# Altium PCB TIDA01398_TID.PcbDoc (part 1 of 2)
Units mil, origin at the board's own origin, x right, y up, seen from the top; angles counter-clockwise.
Board outline 2952.76 x 1377.95 mil, 4 copper layers (Layer 1 - Top Layer, Layer 2 - GND, Layer 3 - PWR, Layer 4 - Bottom Layer), stack 43.668 mil thick; 120 components, 47 nets, 270 pads, 188 vias.
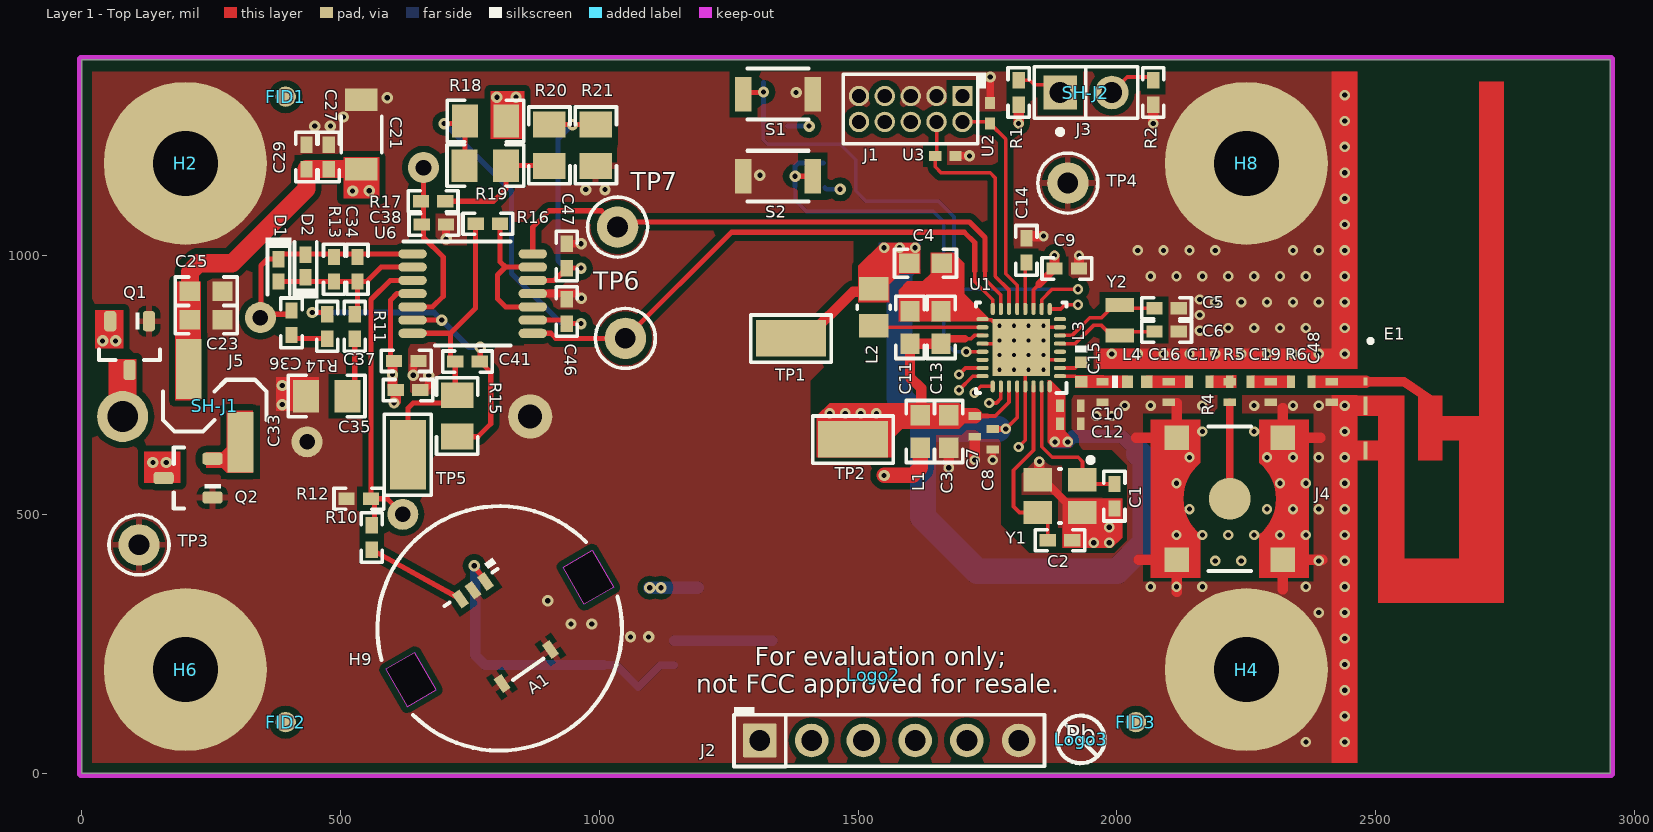
[diagram p0: Layer 1 - Top Layer view]
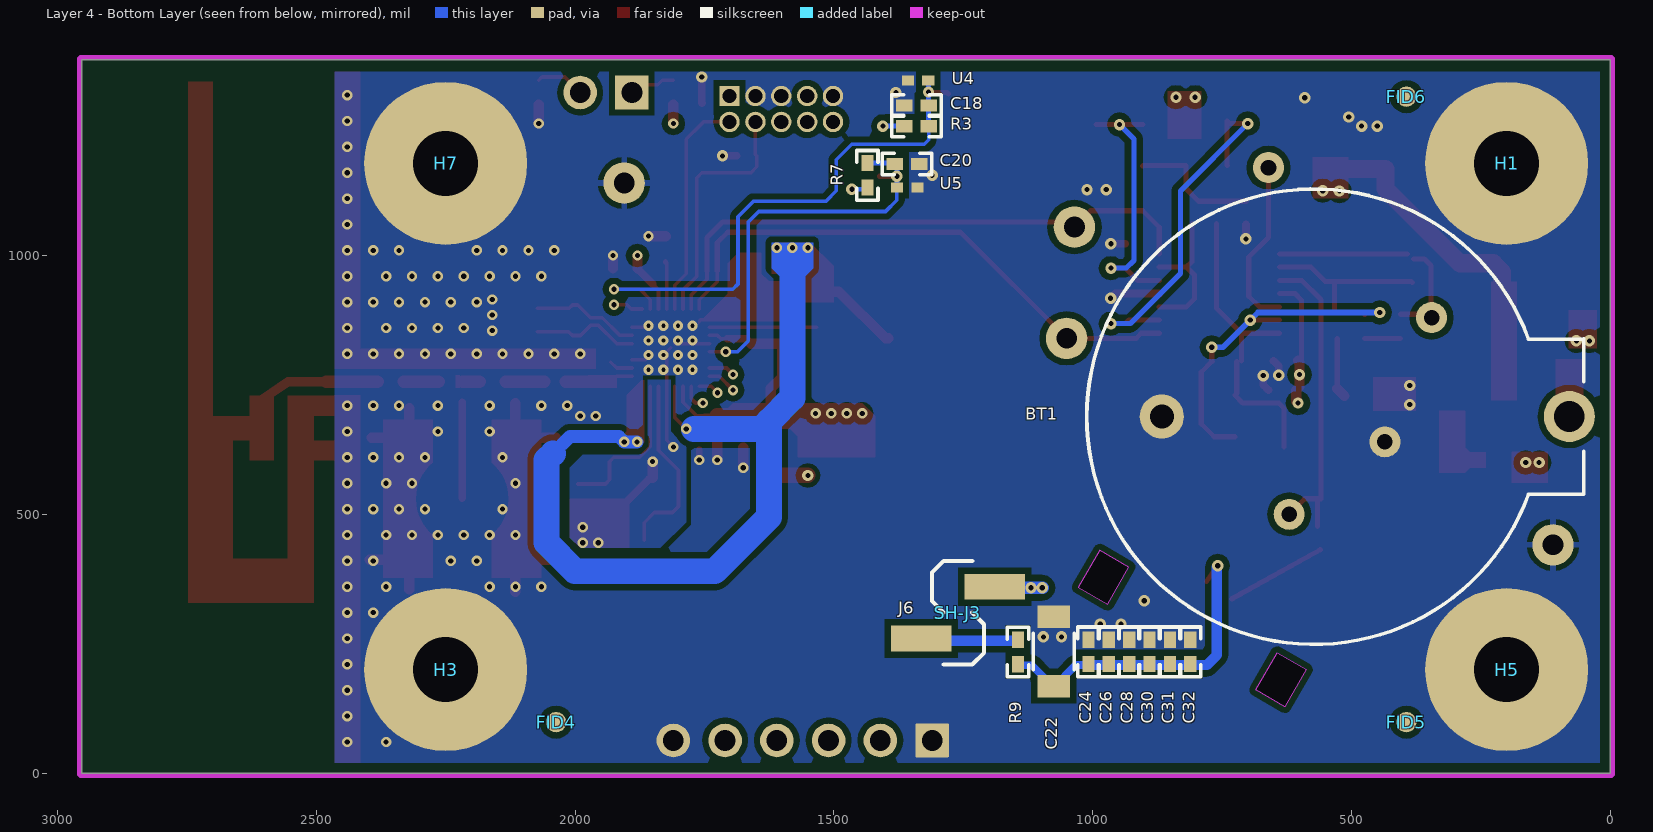
[diagram p1: Layer 4 - Bottom Layer view, seen from below]
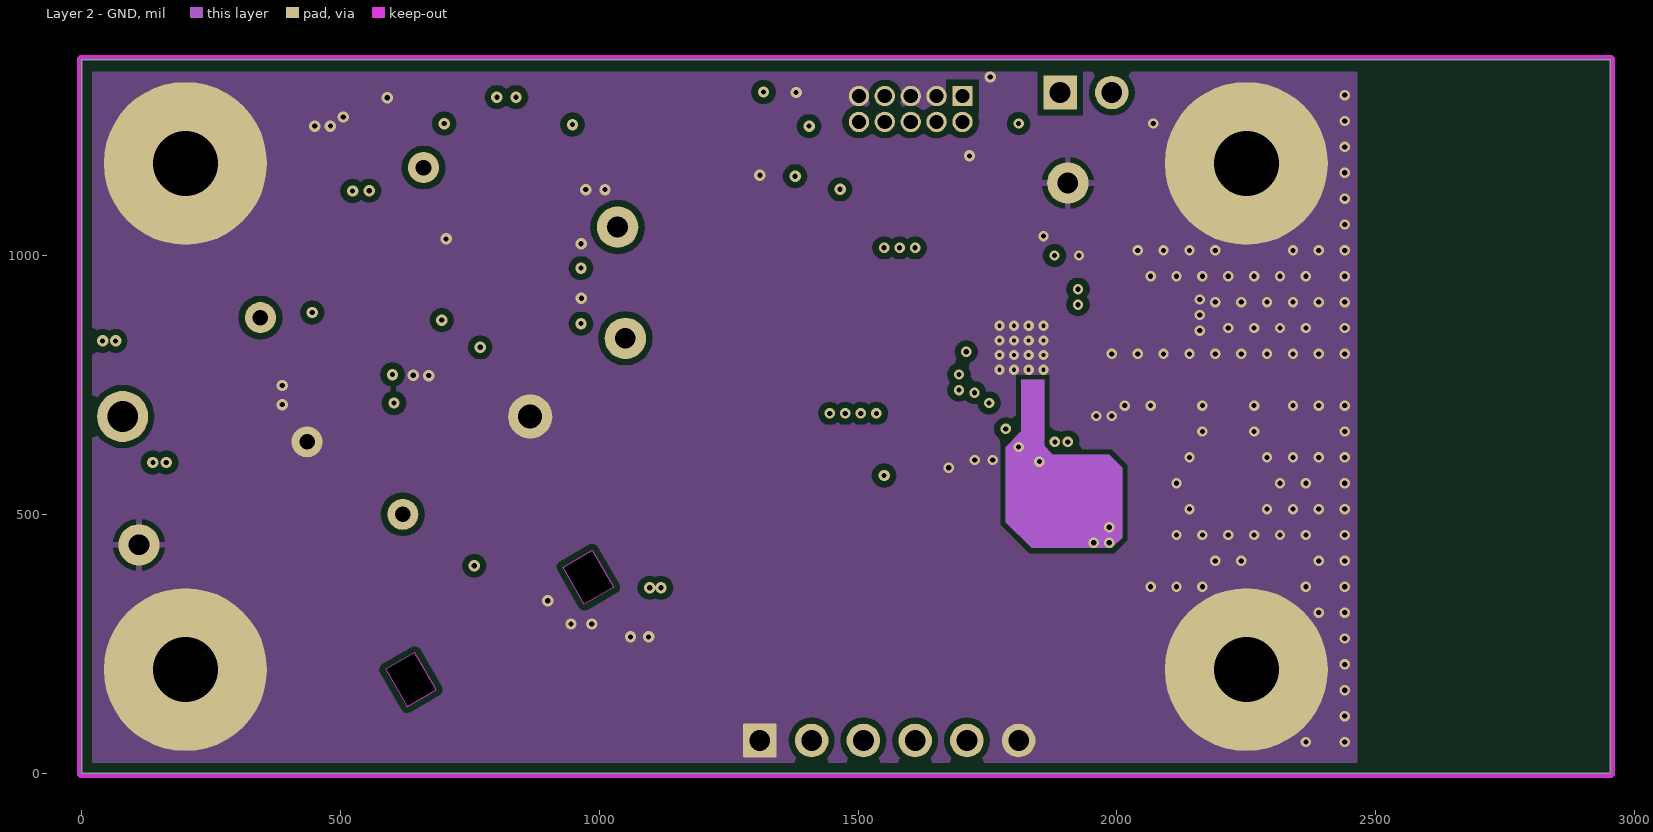
[diagram p2: Layer 2 - GND]
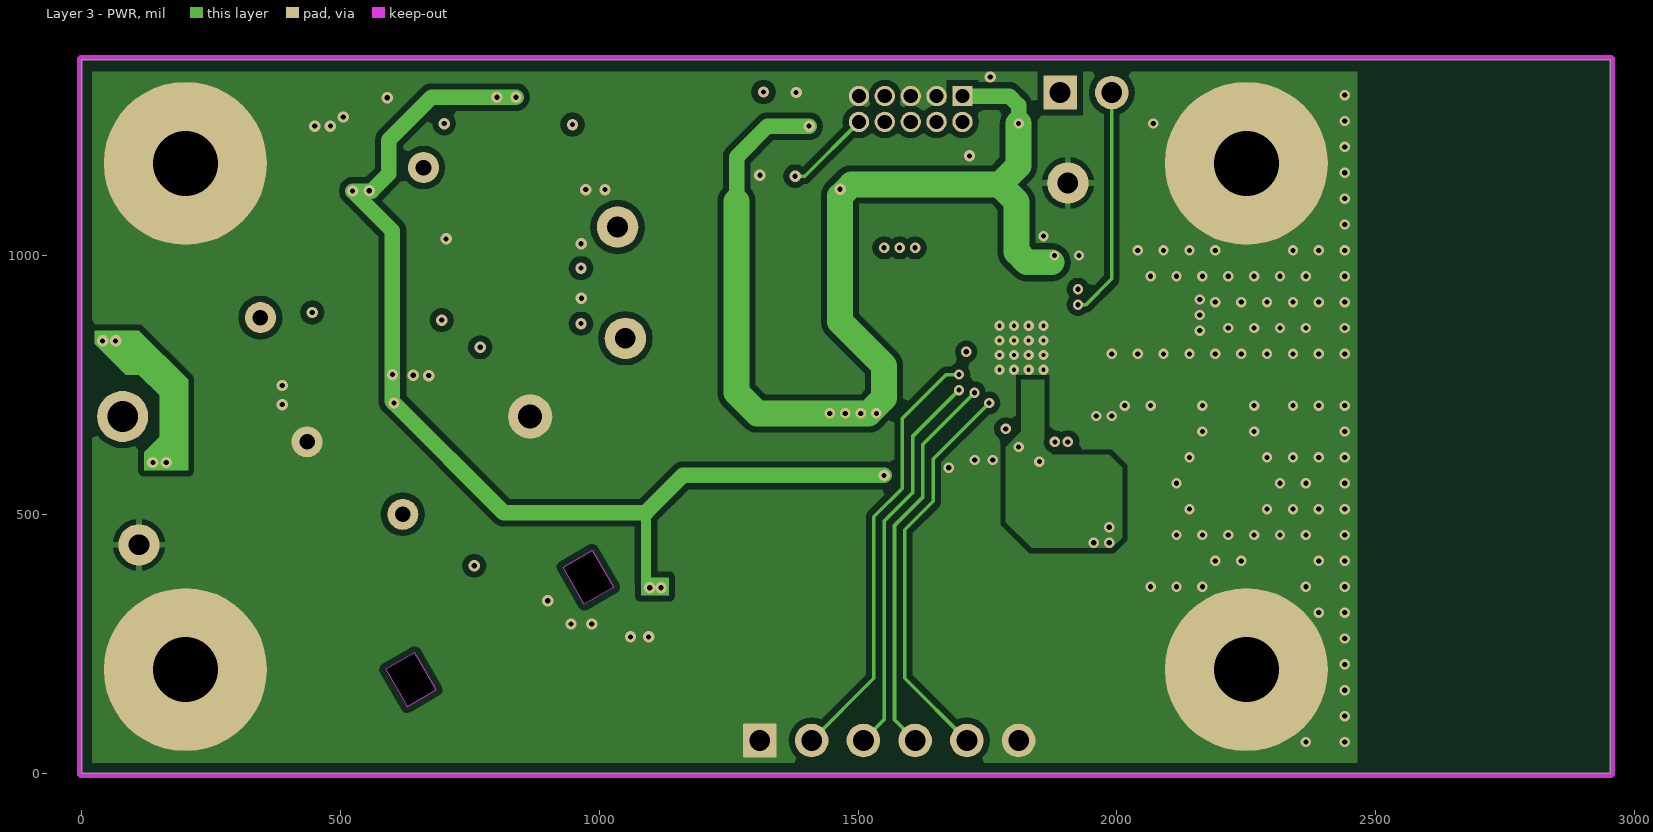
[diagram p3: Layer 3 - PWR]

## Layer stack, top to bottom
Top Solder: solder mask 0.4, Solder Resist, Dk 3.5
Layer 1 - Top Layer: signal copper 1.417
Dielectric 1: prepreg 14, 370HR, Dk 4.2
Layer 2 - GND: signal copper 1.417
Dielectric 2: core 10, 370HR, Dk 4.2
Layer 3 - PWR: signal copper 1.417
Dielectric 3: prepreg 14, 370HR, Dk 4.2
Layer 4 - Bottom Layer: signal copper 1.417
Bottom Solder: solder mask 0.4, Solder Resist, Dk 3.5

## Board outline
0,0 2952.76,0 2952.76,1377.95 0,1377.95

## Design rules (kind name [scope] priority, off if disabled: settings)
Clearance Clearance_1 [inpoly] p1: gap=12
Clearance "Stitching GND" [IsStitchingVia and InNet('GND') vs (IsVia and (Not IsStitchingVia)) Or IsPad] p2: gap=20
Clearance [All] p3: gap=6
ComponentClearance "ComponentClearance_RF Chain" [(InComponent('R4') OR InComponent('R5'))] p1: gap=0 collisioncheckmode=3 verticalgap=0 showdistances=FALSE
ComponentClearance ComponentClearance_Shunt [InComponentClass('Header') vs InComponentClass('Shunt')] p2: gap=0 collisioncheckmode=3 verticalgap=0 showdistances=FALSE
ComponentClearance ComponentClearance_H9 [incomponent('A1') vs incomponent('H9')] p3: gap=0 collisioncheckmode=3 verticalgap=0 showdistances=FALSE
ComponentClearance [All] p4: gap=3.94 collisioncheckmode=3 verticalgap=3.94 showdistances=FALSE
FabricationTestPointUsage TestPointUsage [All] p1: valid=0 allowmultiple=FALSE
FabricationTestpoint Testpoint [All] p1: side=3 testpointundercomponent=TRUE minsize=40 maxsize=100 preferedsize=60 minholesize=0 maxholesize=40 preferedholesize=32 testpointgrid=1 allowsidetop=TRUE allowsidebottom=TRUE usegrid=TRUE gridtolerance=0.01
HoleSize [All] p1: absolutevalues=TRUE maxlimit=500 minlimit=7.8 maxpercent=80.000 minpercent=20.000
MinimumSolderMaskSliver [All] p1: minsoldermaskwidth=3.9
PolygonConnect PolygonConnect_TR [incomponent('A1') or  incomponent('Q1') or InComponent('Q2')OR incomponent('J4') OR InComponent('R21')OR InComponent('TP3')OR InComponent('TP4')] p1: connectstyle=Relief reliefconductorwidth=12 reliefentries=4 polygonreliefangle="90 Angle" airgapwidth=10
PolygonConnect [All] p2: connectstyle=Direct reliefconductorwidth=10 reliefentries=4 polygonreliefangle="90 Angle" airgapwidth=10
RoutingVias [All] p1: holewidth=10 width=22 viastyle="Through Hole" minholewidth=7.8 minwidth=19 maxholewidth=28 maxwidth=50
SilkToBoardRegionClearance [All] p1 off:
SilkToSilkClearance SilkToSilkClearance_1 [(HasFootprint('Pb-Free_Overlay_Medium') OR HasFootprint('Pb-Free_Overlay_Small')) vs (HasFootprint('Pb-Free_Overlay_Medium') OR HasFootprint('Pb-Free_Overlay_Small'))] p1: silktosilkclearance=0
SilkToSilkClearance [All] p2: silktosilkclearance=3
SilkToSolderMaskClearance SilkscreenOverComponentPads [IsPad] p1: minsilkscreentomaskgap=3 clearancetoexposedcopper=TRUE
SolderMaskExpansion [All] p1: expansion=1.97
Width [All] p1: maxlimit=100 minlimit=6 preferedwidth=10 minimp=50.000000 maximp=50.000000 favimp=50.000000
22 further rules are at their usual default settings.

## Classes and differential pairs
component class FiducialMark: FID1 FID2 FID3 FID4 FID5 FID6
component class TIDA01398_TID_Hardware: FID1 FID2 FID3 FID4 FID5 FID6 H1 H2 H3 H4 H5 H6 H7 H8 H9 Logo1 Logo2 Logo3 SH-J1 SH-J2 SH-J3 ZZ1 ZZ2 ZZ3 ZZ4
component class "Mounting Holes": H2 H4 H6 H8
component class Header: J1 J2 J3 J5 J6
component class AssemblyNote: ZZ1 ZZ2 ZZ3 ZZ4
component class Shunt: SH-J1 SH-J2 SH-J3
component class TIDA01398_MCU: C1 C2 C3 C4 C5 C6 C7 C8 C9 C10 C11 C12 C13 C14 C15 C16 C17 C18 C19 C20 C48 E1 J1 J2 J3 J4 L1 L2 L3 L4 R1 R2 R3 R4 R5 R6 R7 S1 S2 TP1 TP2 U1 U2 U3 U4 U5 Y1 Y2
component class TIDA01398_POWER_PIR: A1 BT1 C21 C22 C23 C24 C25 C26 C27 C28 C29 C30 C31 C32 C33 C34 C35 C36 C37 C38 C41 C46 C47 D1 D2 J5 J6 Q1 Q2 R9 R10 R11 R12 R13 R14 R15 R16 R17 R18 R19 R20 R21 TP3 TP4 TP5 TP6 TP7 U6

## Components (designator, comment, footprint, x,y, rotation, side; value= is the part's Value field where it differs from the comment)
A1 "IRS-B210ST01-R1" Murata_IRS-B210ST01 807.09,279.53 r305 top locked
BT1 "BS-7" BAT_BS-7 472.44,688.98 r0 bottom locked
C1 "GRM1555C1E120JA01D" 0402 1995,535 r90 top
C2 "GRM1555C1E120JA01D" 0402 1890,450 r180 top
C3 "Used in BOM report" 0603 1675,660 r270 top
C4 "GRM188R60J106ME47D" 0603 1630,985 r180 top
C5 "GRM1555C1E120JA01D" 0402 2096,898 r0 top
C6 "GRM1555C1E120JA01D" 0402 2096,853 r0 top
C7 "GRM155R70J104KA01D" 0402S 1725,670 r270 top
C8 "GRM155R70J104KA01D" 0402S 1760,645 r270 top
C9 "GRM155R70J104KA01D" 0402 1903,975 r0 top
C10 "GRM155R70J104KA01D" 0402S 1910,710 r0 top
C11 "GRM188R60J106ME47D" 0603 1600,861 r270 top
C12 "Used in BOM report" 0402S 1910,675 r0 top
C13 "GRM188R71E104KA01D" 0603 1660,861 r270 top
C14 "GRM155R61A105KE15D" 0402 1825,1010 r90 top
C15 "GRM1555C1H1R2BA01D" 0402S 1972,736.3 r270 top
C16 "GRM1555C1H1R2BA01D" 0402S 2100,736.3 r270 top
C17 "GRM1555C1H120JA01D" 0402S 2159,756.3 r180 top
C18 "C1005X7R1H222K" 0402 1340,1290 r180 bottom
C19 "Used in BOM report" 0402S 2297,736.3 r90 top
C20 "C1005X7R1H222K" 0402 1358.37,1176.9 r0 bottom
C21 "C3216X5R1A107M160AC" 1206_190 540,1233.9 r90 top
C22 "C3216X5R1A107M160AC" 1206_190 1075,235 r90 bottom
C23 "C1608X5R0J106M" 0603 240,876.18 r0 top
C24 "GRM155R60J106ME44D" 0402 1007.89,234.25 r90 bottom
C25 "C1608X7R1C105K" 0603 240,931.3 r0 top
C26 "C1005X5R1A105K050BB" 0402 968.52,234.25 r90 bottom
C27 "C1005X7R1H104K050BB" 0402 477.01,1190.59 r90 top
C28 "C1005X7R1H104K050BB" 0402 929.15,234.25 r90 bottom
C29 "C1005X7R1C103K050BA" 0402 433.7,1190.59 r90 top
C30 "C1005X7R1C103K050BA" 0402 889.78,234.25 r90 bottom
C31 "C1005X7R1H102K" 0402 850.41,234.25 r90 bottom
C32 "C0402C101J3GACTU" 0402 811.04,234.25 r90 bottom
C33 "C2012X5R1A336M125AC" 0805_HV 473,728.46 r180 top
C34 "C1005X7R1E103K" 0402 532.21,973.46 r270 top
C35 "C1005X7R1H104K" 0402 630,740 r180 top
C36 "C1005X5R1A335K050BC" 0402 405,870 r90 top
C37 "C1005X7R1H102K" 0402 626.65,796.46 r0 top
C38 "C1005X7R1H104K" 0402 680,1060 r0 top
C41 "C1005C0G1E102J" 0402 745,795 r0 top
C46 "C1005X7R1H104K" 0402 936.65,892.01 r90 top
C47 "C1005X7R1H104K" 0402 936.65,999.26 r90 top
C48 "Used in BOM report" 0402S 2415,736.3 r90 top
D1 "1N4148X-TP" SOD-523 380,971.46 r270 top
D2 "1N4148X-TP" SOD-523 432.21,979.7 r90 top
E1 "ANTENNA_DN007A" ANTENNA_DN007A 2480.32,756.03 r270 top locked net-tie
FID1 "Fiducial" Fiducial10-20 393.7,1307.09 r0 top
FID2 "Fiducial" Fiducial10-20 393.7,98.42 r0 top
FID3 "Fiducial" Fiducial10-20 2036.61,98.42 r0 top
FID4 "Fiducial" Fiducial10-20 2036.61,98.42 r90 bottom
FID5 "Fiducial" Fiducial10-20 393.7,98.42 r90 bottom
FID6 "Fiducial" Fiducial10-20 393.7,1307.09 r90 bottom
H1 "1902C" Keystone_1902C#1 200,1177.95 r180 bottom
H2 "NY PMS 440 0025 PH" "NY PMS 440 0025 PH" 200,1177.95 r0 top
H3 "1902C" Keystone_1902C#2 2250,200 r180 bottom locked
H4 "NY PMS 440 0025 PH" "NY PMS 440 0025 PH" 2250,200 r0 top locked
H5 "1902C" Keystone_1902C#2 200,200 r180 bottom locked
H6 "NY PMS 440 0025 PH" "NY PMS 440 0025 PH" 200,200 r0 top locked
H7 "1902C" Keystone_1902C#1 2250,1177.95 r180 bottom
H8 "NY PMS 440 0025 PH" "NY PMS 440 0025 PH" 2250,1177.95 r0 top
H9 "IML-0669" Murata_IML-0669 807.09,279.53 r210 top locked
J1 "GRPB052VWVN-RC" CONN_GRPB052VWVN-RC 1601.42,1283.19 r180 top
J2 "TSW-106-07-G-S" TSW-106-07-G-S 1560,62.99 r0 top
J3 "TSW-102-07-G-S" TSW-102-07-G-S 1940,1315 r0 top
J4 "CONSMA001-SMD-G" Linx_CONSMA001-SMD-G 2218,530 r0 top
J5 "87898-0204" Molex_87898-0204 256.42,710 r180 top
J6 "87898-0204" Molex_87898-0204 1260,310 r90 bottom
L1 "BLM18HE152SN1D" 0603 1620,660 r90 top
L2 "CKS2125100M-T" 0805_145 1530,900 r90 top
L3 "LQG15HS15NJ02D" IND_LQG15H#1 1931,775 r270 top
L4 "LQG15HS2N0S02D" IND_LQG15H#2 2039,756.3 r0 top
Logo2 "FCC disclaimer" FCC_disclaimer_stacked 1529.51,189.64 r0 top
Logo3 "Pb-Free Symbol" Pb-Free_Overlay_Small 1930,65 r0 top
Q1 "SI2323DS" SOT-23 92,826 r270 top
Q2 "SI2323DS" SOT-23 205,570 r180 top
R1 "CRCW04020000Z0ED" 0402 1810,1315 r270 top
R2 "CRCW0402100KFKED" 0402 2070,1315 r90 top
R3 "CRCW040247K5FKED" 0402 1340,1250 r0 bottom
R4 "CRCW04020000Z0ED" 0402S 2218,736.3 r270 top
R5 "CRCW04020000Z0ED" 0402S 2238,756.3 r0 top
R6 "CRCW04020000Z0ED" 0402S 2356,756.3 r0 top
R7 "CRCW040247K5FKED" 0402 1435,1155 r270 bottom
R9 "CRCW0402619KFKED" 0402 1144,234 r90 bottom
R10 "CRCW04020000Z0ED" 0402 560,455 r90 top
R11 "CRCW04026K81FKED" 0402 527,863.08 r90 top
R12 "CRCW04021M30FKED" 0402 535,530 r0 top
R13 "CRCW04021M50FKED" 0402 487.21,973.46 r90 top
R14 "CRCW040268K1FKED" 0402 474,863.08 r90 top
R15 "RMCF0805JT15M0" 0805_HV 725,690 r90 top
R16 "CRCW04020000Z0ED" 0402 784.38,1061.46 r0 top
R17 "CRCW04020000Z0ED" 0402 678.62,1105 r0 top
R18 "RMCF0805JT15M0" 0805_HV 780,1260 r0 top
R19 "RMCF0805JT15M0" 0805_HV 779.48,1173.8 r180 top
R20 "RMCF0805JT15M0" 0805_HV 903,1212.94 r270 top
R21 "RMCF0805JT15M0" 0805_HV 993,1212.94 r90 top
S1 "B3U-1000P" SW_B3U-1000P 1345,1312 r180 top
S2 "B3U-1000P" SW_B3U-1000P 1345,1153.26 r0 top
SH-J1 "969102-0000-DA" SNT-100-BK-G#1 256.42,710 r0 top
SH-J2 "969102-0000-DA" SNT-100-BK-G#1 1940,1315 r0 top
SH-J3 "969102-0000-DA" SNT-100-BK-G#2 1260,310 r270 bottom
TP1 "5015" Testpoint_Keystone_Miniature 1370,840 r0 top
TP2 "5015" Testpoint_Keystone_Miniature 1490,645 r0 top
TP3 "5001" Keystone5001 110.24,440.94 r0 top
TP4 "5001" Keystone5001 1905,1140 r0 top
TP5 "5015" Testpoint_Keystone_Miniature 630,615 r270 top
TP6 "5004" Keystone5004 1050,840 r0 top
TP7 "5004" Keystone5004 1035,1055 r0 top
U1 "CC2650F128RSMR" RSM0032B 1815,822 r180 top locked
U2 "TPD1E10B06DPYR" DPY0002A 1754.69,1275.04 r90 top
U3 "TPD1E10B06DPYR" DPY0002A 1668.35,1192.64 r0 top
U4 "TPD1E10B06DPYR" DPY0002A 1337,1338 r0 bottom
U5 "TPD1E10B06DPYR" DPY0002A 1358.09,1131.3 r180 bottom
U6 "TLV8544PWR" PW0014A_N 755,926.46 r0 top
Y1 "TSX-3225 24.0000MF20G-AC3" EPSON_TSX-3225 1890,535 r270 top
Y2 "FC-12M 32.7680KA-A3" Epson_FC-12M 2005,875 r90 top
ZZ1 "These assemblies are ESD sensitive, ESD precautions shall be observed." AssemblyNote 160,1950 r0 top
ZZ2 "These assemblies must be clean and free from flux and all contaminants. Use of no clean flux is not acceptable." AssemblyNote 160,1820 r0 top
ZZ3 "These assemblies must comply with workmanship standards IPC-A-610 Class 2, unless otherwise specified." AssemblyNote 160,1695 r0 top
ZZ4 "After verifying lens of A1 is clean and undistorted, snap cover H9 over sensor A1 during final hardware assembly." AssemblyNote 160,1575 r0 top

## Footprints (in the part's own frame and the unit in brackets; to place one, negate y for a bottom-side part, rotate by r counter-clockwise, add the part's x,y. Pads: shape width x height; smd on the part's side, far side on the other; paste and mask are expansions set on the pad)
0402 [mm] "0402 from SM-752 data"
  rect 0.8x0.6 smd: 1(-0.6,0) 2(0.6,0)
  silkscreen extent -1.22,-0.52 1.22,0.52, body extent -0.55,-0.3 0.55,0.3, height 0.6
0402S [mil] "Based on C0402S footprint from PADS legacy"
  rect 15x24 smd: 1(-20,0) 2(20,0)
  body extent -22,-12 22,12, height 24
0603 [mm] "0603 from SM-752 data"
  rect 1x0.95 smd: 1(-0.8,0) 2(0.8,0)
  silkscreen extent -1.52,-0.69 1.52,0.69, body extent -0.87,-0.47 0.87,0.47, height 1
0805_145 [mm] "0805 / 1.45mm height"
  rect 1.15x1.45 smd: 1(-0.9,0) 2(0.9,0)
  silkscreen extent -0.1,-0.8 0.1,0.8, body extent -1.1,-0.72 1.1,0.72, height 1.45
0805_HV [mil] "0805 with 30mil clearance between pads"
  rect 50x63 smd: 1(-40,0) 2(40,0)
  silkscreen extent -74,-40 74,40, body extent -43,-29 43,29, height 57
1206_190 [mm] "1206_190"
  rect 1.1x1.6 smd: 1(-1.7,0) 2(1.7,0)
  silkscreen extent -0.9,-1 0.9,1, body extent -1.75,-0.95 1.75,0.95, height 1.9
ANTENNA_DN007A [mm] "SMD, 3-Leads"
  rect 0.4x0.2 smd paste-2 mask-2: 1(-0.007,0)
  rect 0.9x0.2 smd paste-2 mask-2: 2(1.18,-0.01) 3(3.37,0)
  Layer 1 - Top Layer region: 10.84,0.63 10.84,6.775 -14.715,6.775 -14.715,5.59 1.685,5.59 1.685,3.765 0.685,3.765 0.685,3.271 -0.225,1.951 -0.225,-0.11 0.21,-0.11 0.21,1.816 0.737,2.58 3.86,2.58 3.86,3.765 2.86,3.765 2.86,4.59 8.685,4.59 8.685,1.895 0.685,1.895 0.685,-0.11 1.66,-0.11 1.66,0.63 2.885,0.63 2.885,-0.11 3.86,-0.11 3.86,0.63
  silkscreen extent -2.11,0.15 -1.91,0.35
AssemblyNote [mil] "Assembly Note"
BAT_BS-7 [mm] "Memory Protection Devices CR2032 battery holder"
  round 2.5 hole 1.5: 1(-10,0)
  round 2.17 hole 1.181: 2(10,0)
  silkscreen extent -10.7,-11.16 13.68,11.18, body extent -10.69,-11.16 13.7,11.16, height 9.02
CONN_GRPB052VWVN-RC [mm] "SULLINS"
  rect 1x1 hole 0.7 mask+0.08: 1(-2.54,-0.635)
  round 1 hole 0.7 mask+0.08: 2(-2.54,0.635) 3(-1.27,-0.635) 4(-1.27,0.635) 5(0,-0.635) 6(0,0.635) 7(1.27,-0.635) 8(1.27,0.635) 9(2.54,-0.635) 10(2.54,0.635)
  silkscreen extent -3.7,-1.8 3.3,1.7, body extent -3.17,-1.7 3.17,1.7, height 4
DPY0002A [mm] "R-PX2SON-N2"
  rect 0.6x0.5 smd: 1(-0.5,0) 2(0.5,0)
  body extent -0.55,-0.35 0.55,0.35, height 0.4
Epson_FC-12M [mm] "Epson"
  rect 0.7x1.4 smd: 1(-0.75,0) 2(0.75,0)
  body extent -1.05,-0.63 1.05,0.63, height 0.6
EPSON_TSX-3225 [mm] "SMD, 4-Leads, Body 2.65x3.35mm, Height 0.6mm"
  rect 1.15x1.4 smd: 1(-0.8,1.1) 2(-0.8,-1.1) 3(0.8,-1.1) 4(0.8,1.1)
  silkscreen extent -1.9,-0.05 1.33,1.63, body extent -1.33,-1.68 1.33,1.68, height 0.61
FCC_disclaimer_stacked [mil]
Fiducial10-20 [mm]
  round 1 smd mask+0.5: 1(0,0)
IND_LQG15H#1 [mm] "MuRata"
  rect 0.55x0.6 smd: 1(-0.475,0) 2(0.475,0)
  silkscreen extent -1.3,-0.3 -0.95,0.3, body extent -0.52,-0.27 0.52,0.27, height 0.55
IND_LQG15H#2 [mm] "MuRata"
  rect 0.55x0.61 smd: 1(-0.475,0) 2(0.475,0)
  silkscreen extent -1.23,-0.3 -0.95,0.3, body extent -0.52,-0.27 0.52,0.27, height 0.55
Keystone5001 [mil] "For Keystone 500x miniature loop terminals"
  round 80 hole 40: 1(0,0)
  silkscreen extent -58,-58 58,58, body extent -49,-49 49,49, height 182
Keystone5004 [mil] "For Keystone 500x miniature loop terminals"
  round 80 hole 40: 1(0,0)
  silkscreen extent -58,-58 58,58, body extent -49,-49 49,49, height 182
Keystone_1902C#1 [mil] "Hex Standoff, 4-40 threaded, nylon"
  round 1 on Mech4: 0(0,0)
  body extent -145,-126 146,126, height 501
Keystone_1902C#2 [mil] "Hex Standoff, 4-40 threaded, nylon"
  body extent -145,-126 146,126, height 501
Linx_CONSMA001-SMD-G [mm] "SMD, 5-Leads, Body 7x7mm, Height 10.5mm"
  round 2.05 smd: 1(0,0)
  rect 1.2x1.2 smd: 2(-2.6,-3) 3(2.6,-3) 4(2.6,3) 5(-2.6,3)
  Layer 1 - Top Layer region: -3.88,-3.88 -1.44,-3.88 -1.44,-1.761 -1.448,-1.761 -2.062,-0.974 -2.28,0 -2.062,0.974 -1.448,1.761 -1.448,1.761 -1.44,1.761 -1.44,3.88 -3.88,3.88
  Layer 1 - Top Layer region: 3.88,-3.88 1.44,-3.88 1.44,-1.761 1.448,-1.761 2.062,-0.974 2.28,0 2.062,0.974 1.448,1.761 1.448,1.761 1.44,1.761 1.44,3.88 3.88,3.88
  silkscreen extent -1.04,-3.55 1.04,3.55, body extent -3.55,-3.55 3.55,3.55, height 10.5
Molex_87898-0204 [mm] "Header, 2.54 mm, 2x1, R/A, SMT"
  rect 1.27x2.96 smd: 1(-1.27,1.8) 2(1.27,-1.8)
  silkscreen extent -2.54,-1.27 2.54,1.27, body extent -2.54,-2.4 2.54,2.4, height 9.65
Murata_IML-0669 [mil] "Pyroelectric Infrared Lens, TH"
  Keep-Out Layer board cut-out: 165.35,-41.34 230.31,-41.34 230.31,41.34 165.35,41.34
  Keep-Out Layer board cut-out: -165.35,-41.34 -230.31,-41.34 -230.31,41.34 -165.35,41.34
  silkscreen extent -228,-236 228,236, body extent -256,-236 256,236, height 335
Murata_IRS-B210ST01 [mm] "SMD, 5-Leads, Body 4.7x4.7mm"
  rect 0.825x0.45 smd: 1(-2.288,0.75) 2(-2.288,0) 3(-2.288,-0.75) 4(2.288,-1.45) 5(2.288,1.45)
  silkscreen extent -3.05,-1.6 2.45,1.7, body extent -2.45,-2.45 2.45,2.45, height 2.61
"NY PMS 440 0025 PH" [mm] "4-40 nylon screw and mounting hole"
  round 8 hole 3.2: 1(0,0)
  body extent -3.3,-3.3 3.3,3.3, height 2.69
Pb-Free_Overlay_Small [mil]
  silkscreen extent -46,-46 46,46
PW0014A_N [mm] "TSOP, 14-Leads, Body 5x4.4mm, Pitch 0.65mm, IPC Medium Density"
  oval 1.4x0.45 smd: 1(-2.95,1.95) 2(-2.95,1.3) 3(-2.95,0.65) 4(-2.95,0) 5(-2.95,-0.65) 6(-2.95,-1.3) 7(-2.95,-1.95) 8(2.95,-1.95) 9(2.95,-1.3) 10(2.95,-0.65) 11(2.95,0) 12(2.95,0.65) 13(2.95,1.3) 14(2.95,1.95)
  silkscreen extent -3.4,-2.55 1.85,2.55, body extent -3.21,-2.5 3.21,2.5, height 1
RSM0032B [mm] "QFN, 32-Leads, Body 4x4mm, Pitch 0.4mm, Thermal Pad 2.8x2.8mm, TI Recommended"
  oval 0.6x0.2 smd mask+0.025: 1(-1.9,1.4) 2(-1.9,1) 3(-1.9,0.6) 4(-1.9,0.2) 5(-1.9,-0.2) 6(-1.9,-0.6) 7(-1.9,-1) 8(-1.9,-1.4) 17(1.9,-1.4) 18(1.9,-1) 19(1.9,-0.6) 20(1.9,-0.2) 21(1.9,0.2) 22(1.9,0.6) 23(1.9,1) 24(1.9,1.4)
  oval 0.2x0.6 smd mask+0.025: 9(-1.4,-1.9) 10(-1,-1.9) 11(-0.6,-1.9) 12(-0.2,-1.9) 13(0.2,-1.9) 14(0.6,-1.9) 15(1,-1.9) 16(1.4,-1.9) 25(1.4,1.9) 26(1,1.9) 27(0.6,1.9) 28(0.2,1.9) 29(-0.2,1.9) 30(-0.6,1.9) 31(-1,1.9) 32(-1.4,1.9)
  rect 2.8x2.8 smd paste-1.4 mask+0.025: 33(0,0)
  silkscreen extent -2.23,-2.23 2.23,2.23, body extent -2.07,-2.07 2.08,2.08, height 1.01
SNT-100-BK-G#1 [mil] "Samtec STEP model"
  round 1 on Mech3: 0(0,0)
  body extent -100,-50 100,50, height 344
SNT-100-BK-G#2 [mil] "Samtec STEP model"
  round 1 on Mech4: 0(0,0)
  body extent -100,-50 100,50, height 344
SOD-523 [mm] "NXP Semiconductor recommended land pattern, nominal STEP model"
  rect 0.8x0.6 smd paste-0.05: 1(-0.55,0) 2(0.55,0)
  silkscreen extent -1.6,-0.63 1.2,0.64, body extent -0.8,-0.4 0.8,0.4, height 0.72
SOT-23 [mm] "SOT23, 3-Leads, Body 2.9x1.3mm, Pitch 0.95mm, Lead Span 2.5mm, IPC Medium Density"
  rrect50% 1x0.6 smd: 1(-1.2,0.95) 2(-1.2,-0.95) 3(1.2,0)
  silkscreen extent -1.63,-1.5 0.7,1.5, body extent -1.16,-1.45 1.21,1.45, height 1
SW_B3U-1000P [mm] "OMRON"
  rect 0.8x1.7 smd: 1(-1.7,0) 2(1.7,0)
  silkscreen extent -1.5,-1.25 1.5,1.25, body extent -1.5,-1.25 1.5,1.25, height 1.75
Testpoint_Keystone_Miniature [mil] "Miniature SMT test point"
  rect 135x70 smd: 1(0,0)
  silkscreen extent -78,-46 78,45, body extent -52,-20 52,20, height 61
TSW-102-07-G-S [mm] "Samtec 100mil, 1x2, 230 mil above insulator"
  rect 1.65x1.65 hole 1.016 mask+0: 1(-1.27,0)
  round 1.65 hole 1.016 mask+0: 2(1.27,0)
  silkscreen extent -2.54,-2.06 2.54,1.27, body extent -2.54,-1.27 2.54,1.27, height 8.38
TSW-106-07-G-S [mm] "Samtec 100mil, 1x6, 230 mil above insulator"
  rrect6% 1.65x1.65 hole 1.016: 1(-6.35,0)
  round 1.65 hole 1.016: 2(-3.81,0) 3(-1.27,0) 4(1.27,0) 5(3.81,0) 6(6.35,0)
  silkscreen extent -7.62,-1.27 7.62,1.65, body extent -7.62,-1.27 7.62,1.27, height 8.38

## Part data
A1: "Pyroelectric Infrared Sensors for Reflow Soldering, 3.6mVp-p, SMD"
BT1: "Battery Holder, CR2032, Retainer clip, TH"
C1 C2 C5 C6: "CAP, CERM, 12 pF, 25 V, +/- 5%, C0G/NP0, 0402"
C3 C12 C19 C48: library part Capacitor, "CAP, CERM, xxxF, xxV, [TempCo], xx%, [PackageReference]"
C4 C11 C23: "CAP, CERM, 10 µF, 6.3 V, +/- 20%, X5R, 0603"
C7 C8 C9 C10: "CAP, CERM, 0.1 µF, 6.3 V, +/- 10%, X7R, 0402"
C13: "CAP, CERM, 0.1 µF, 25 V, +/- 10%, X7R, 0603"
C14 C26: "CAP, CERM, 1 µF, 10 V, +/- 10%, X5R, 0402"
C15 C16: "CAP, CERM, 1.2 pF, 50 V, +/- 8.3%, C0G/NP0, 0402"
C17: "CAP, CERM, 12 pF, 50 V, +/- 5%, C0G/NP0, 0402"
C18 C20: "CAP, CERM, 2200 pF, 50 V, +/- 10%, X7R, 0402"
C21 C22: "CAP, CERM, 100 µF, 10 V, +/- 20%, X5R, 1206_190"
C24: "CAP, CERM, 10 µF, 6.3 V, +/- 20%, X5R, 0402"
C25: "CAP, CERM, 1 µF, 16 V, +/- 10%, X7R, 0603"
C27 C28 C35 C38 C46 C47: "CAP, CERM, 0.1 µF, 50 V, +/- 10%, X7R, 0402"
C29 C30: "CAP, CERM, 0.01 µF, 16 V, +/- 10%, X7R, 0402"
C31 C37: "CAP, CERM, 1000 pF, 50 V, +/- 10%, X7R, 0402"
C32: "CAP, CERM, 100 pF, 25 V, +/- 5%, C0G/NP0, 0402"
C33: "CAP, CERM, 33 µF, 10 V, +/- 20%, X5R, 0805"
C34: "CAP, CERM, 0.01 µF, 25 V, +/- 10%, X7R, 0402"
C36: "CAP, CERM, 3.3 µF, 10 V, +/- 10%, X5R, 0402"
C41: "CAP, CERM, 1000 pF, 25 V, +/- 5%, C0G/NP0, 0402"
D1 D2: "Diode, Switching, 75 V, 0.3 A, SOD-523"
E1: "2.4GHz PCB Antenna.  There is nothing to buy or mount."
FID1 FID2 FID3 FID4 FID5 FID6: "Fiducial mark.  There is nothing to buy or mount."
H1 H3 H5 H7: "Standoff, Hex, 0.5\"L #4-40 Nylon"
H2 H4 H6 H8: "Machine Screw, Round, #4-40 x 1/4, Nylon, Philips panhead"
H9: "Lens, Ceiling Mount, TH"
J1: "Header, 50mil, 5x2, Gold, TH"
J2: "Header, 100mil, 6x1, Gold, TH"
J3: "Header, 100mil, 2x1, Gold, TH"
J4: "Jack, SMA, PCB, Gold, SMT"
J5 J6: "Header, 2.54 mm, 2x1, Gold, R/A, SMT"
L1: "Ferrite Bead, 1500 ohm @ 100 MHz, 0.5 A, 0603"
L2: "Inductor, Multilayer, Ferrite, 10uH, 0.11A, 0.52 ohm, SMD"
L3: "Inductor, Multilayer, Air Core, 15 nH, 0.3 A, 0.32 ohm, SMD"
L4: "Inductor, Multilayer, Air Core, 2 nH, 0.3 A, 0.1 ohm, SMD"
Logo2: library part FCC_disclaimer, "FCC_disclaimer"
Logo3: library part Pb-Free
Q1 Q2: "MOSFET, P-CH, -20 V, -3.7 A, SOT-23"
R1 R4 R5 R6 R10 R16 R17: "RES, 0, 5%, 0.063 W, 0402"
R2: "RES, 100 k, 1%, 0.063 W, 0402"
R3 R7: "RES, 47.5 k, 1%, 0.063 W, 0402"
R9: "RES, 619 k, 1%, 0.063 W, 0402"
R11: "RES, 6.81 k, 1%, 0.063 W, 0402"
R12: "RES, 1.30 M, 1%, 0.063 W, 0402"
R13: "RES, 1.50 M, 1%, 0.063 W, 0402"
R14: "RES, 68.1 k, 1%, 0.063 W, 0402"
R15 R18 R19 R20 R21: "RES, 15 M, 5%, 0.125 W, AEC-Q200 Grade 0, 0805"
S1 S2: "SWITCH TACTILE SPST-NO 0.05A 12V"
SH-J1 SH-J2 SH-J3: "Shunt, 100mil, Gold plated, Black"
TP1 TP2 TP5: "Test Point, Miniature, SMT"
TP3 TP4: "Test Point, Miniature, Black, TH"
TP6 TP7: "Test Point, Miniature, Yellow, TH"
U1: "Ultra low-power ARM Cortex M3 2.4 GHz Radio MCU, RSM0032B"
U2 U3 U4 U5: "ESD in 0402 Package with 10 pF Capacitance and 6 V Breakdown, 1 Channel, -40 to +125 degC, 2-pin X2SON (DPY), Green (RoHS & no Sb/Br)"
U6: "500 nA RRIO Nanopower Operational Amplifier, PW0014A (TSSOP-14)"
Y1: "Crystal, 24 MHz, 9 pF, SMD"
Y2: "Crystal, 32.768kHz, 12.5pF, SMD"
ZZ1 ZZ2 ZZ3 ZZ4: library part AssemblyNote

## Free pads (board coordinates)
  round 60 hole 30: 0(345,880) 0(435,640) 0(620,500) 0(660,1170)

## Via types
v1: diameter 20, hole 10, Layer 1 - Top Layer to Layer 4 - Bottom Layer, tented both sides, 125 vias
v2: diameter 22, hole 10, Layer 1 - Top Layer to Layer 4 - Bottom Layer, tented both sides, 47 vias
v3: diameter 19.68, hole 7.87, Layer 1 - Top Layer to Layer 4 - Bottom Layer, tented both sides, 16 vias

## Nets (pads, with @x,y where several pads share a name; then routed paths per layer and width w, separated by ;. In a path a pad name is that pad's centre, name@x,y a point inside that pad or via, vN(x,y) a via of type N, cw(c..) or ccw(c..) an arc to the next point about the centre after c; other vN are vias at no path point)
DCDC_SW: L2.1 U1.18 | length 207
  Layer 1 - Top Layer w7: L2.1@1533.26,861.31 1740.2,861.31 U1.18@1740.2,861.37
GND: A1.2 A1.4 A1.5 BT1.2 C1.1 C2.1 C3.2 C4.1 C5.2 C6.2 C7.2 C8.2 C9.2 C10.2 C11.1 C12.2 C13.1 C14.2 C15.2 C16.2 C18.1 C19.1 C20.1 C21.2 C22.2 C23.2 C24.2 C25.2 C26.2 C27.2 C28.2 C29.2 C30.2 C31.2 C32.2 C33.2 C35.1 C37.2 C38.2 C46.2 C47.2 C48.1 E1.2 E1.3 H2.1 H4.1 H6.1 H8.1 J1.3 J1.5 J1.9 J2.1 J2.6 J4.2 J4.3 J4.4 J4.5 pad.0@435,640 Q1.1 Q2.1 R2.1 R12.1 R21.1 S1.1 S2.1 TP3.1 TP4.1 U1.3 U1.7 U1.17 U1.20 U1.29 U1.33 U2.2 U3.2 U4.2 U5.2 U6.11 Y1.2 Y1.4 | length 1463
  Layer 1 - Top Layer w7: U1.20@1740.2,829.87 U1.33@1807.13,829.87 ; v1(1810,630) 1822.87,642.87 U1.29@1822.87,747.2 1822.87,814.13 U1.33@1815,822 ; U1.33@1863.38,798.38 U1.3@1889.8,798.38 ; U1.33@1866.37,861.37 U1.7@1889.8,861.37
  Layer 1 - Top Layer w12: v1(1760,605) C8.2@1760,625
  Layer 1 - Top Layer w15: v2(640.28,768.53) 640.28,786.46 C37.2@650.28,796.46 ; C35.1@660,740 670,750 v2(670,767.92) ; v2(703.62,1032.08) C38.2@703.62,1060 ; U6.11@871.14,926.46 956,926.46 v2(965,917.46) ; C47.2@936.65,1022.88 v2(964.58,1022.88) ; U3.2@1688.03,1192.64 v2(1715,1192.64) ; U2.2@1754.69,1294.72 1755,1295.03 v2(1755,1345) ; Y1.2@1856.81,568.19 Y1.4@1915,510
  Layer 1 - Top Layer w20: v1(1675,590) C3.2@1675,628.5 ; v1(1725,605) C7.2@1725,646.38 ; C14.2@1825,1037.56 v1(1858,1037.56) ; Y1.2@1850,570 v1(1850,601.81) ; C9.2@1926.62,975 v1(1926.62,1000) ; 2036.89,648.11 J4.5@2115.64,648.11 2115.64,714.36 ; 2041.89,411.89 J4.2@2115.64,411.89 v1@2115.64,350.64 ; v1(2070,1255) R2.1@2070,1291.38 ; 2320.36,355.36 J4.3@2320.36,411.89 v1@2396.89,411.89 ; 2320.36,704.64 J4.4@2320.36,648.11 2393.11,648.11
  other v1: 2365,60 2440,60 2440,110 2440,160 2440,210 2440,260 2390,310 2440,310 2065,360 2115,360 2165,360 2365,360 2440,360 2190,410 2240,410 2390,410 2440,410 1955,445 1985,445 2115,460 2165,460 2215,460 2265,460 2315,460 2365,460 2440,460 1985,475 2140,510 2290,510 2340,510 2390,510 2440,510 2115,560 2315,560 2365,560 2440,560 2140,610 2290,610 2340,610 2390,610 2440,610 2165,660 2265,660 2440,660 1960,690 1990,690 2015,710 2065,710 2165,710 2265,710 2340,710 2390,710 2440,710 1990,810 2040,810 2090,810 2140,810 2190,810 2240,810 2290,810 2340,810 2390,810 2440,810 2160,855 2215,860 2265,860 2315,860 2365,860 2440,860 2160,885 2190,910 2240,910 2290,910 2340,910 2390,910 2440,910 2160,915 2065,960 2115,960 2165,960 2215,960 2265,960 2315,960 2365,960 2440,960 2040,1010 2090,1010 2140,1010 2190,1010 2340,1010 2390,1010 2440,1010 2440,1060 2440,1110 2440,1160 2440,1210 2440,1260 2440,1310
  other v2: 1060,263.07 1095,263.07 945,288.07 985,288.07 900,333.07 386.98,711.91 386.98,748.91 973.65,1127.46 1010.65,1127.46 1310,1155 450,1250 480,1250 505,1267.68 590,1305 1380,1315
  other v3: 1772.72,779.25 1801.06,779.25 1829.41,779.25 1857.76,779.25 1772.72,807.6 1801.06,807.6 1829.41,807.6 1857.76,807.6 1772.72,835.94 1801.06,835.94 1829.41,835.94 1857.76,835.94 1772.72,864.29 1801.06,864.29 1829.41,864.29 1857.76,864.29
JTAG_TCK: J1.4 U1.14 U3.1 | length 477.3
  Layer 1 - Top Layer w7: J1.4@1651.42,1258.19 1651.42,1195.39 U3.1@1648.66,1192.64 1648.66,1171.34 1660,1160 1755,1160 1765,1150 1765,959.62 1791.38,933.24 U1.14@1791.38,896.8
JTAG_TMS: J1.2 U1.13 U2.1 | length 434.7
  Layer 1 - Top Layer w7: J1.2@1701.42,1258.19 1751.85,1258.19 U2.1@1754.69,1255.35 ; U2.1@1754.69,1255.31 1785,1225 1785,964.62 1807.13,942.5 U1.13@1807.13,896.8
MODE_SELECTION: J3.2 R2.2 U1.9 | length 599.1
  Layer 1 - Top Layer w7: U1.9@1870.12,896.8 1891.43,896.8 1899.62,905 v1(1924.62,905) ; J3.2@1990,1315 2020.01,1345 2063.62,1345 R2.2@2070,1338.62
  Layer 3 - PWR w7: v1(1924.62,905) 1940,905 1990,955 J3.2@1990,1315
NetA1_1: A1.1 C22.1 C24.1 C26.1 C28.1 C30.1 C31.1 C32.1 R9.1 | length 634.4
  Layer 1 - Top Layer w10: v2(758.1,400.57) A1.1@779.62,370.24
  Layer 4 - Bottom Layer w15: C24.1@1007.9,208.7 1032.44,208.7 1075,166.14 1117.31,208.45 R9.1@1144,208.45
  Layer 4 - Bottom Layer w20: v2@760,398.07 760,228.07 779.37,208.7 C24.1@1007.9,208.7
NetA1_3: A1.3 R10.1 | length 195.8
  Layer 1 - Top Layer w10: R10.1@560,431.38 A1.3@731.24,336.36
NetBT1_1: BT1.1 Q1.3
NetC14_1: C14.1 U1.12 | length 91.5
  Layer 1 - Top Layer w7: U1.12@1822.87,896.8 C14.1@1822.87,986.38
  Layer 1 - Top Layer w10: C14.1@1825,986.38 C14.1@1825,988.35
NetC15_1: C15.1 L3.2 L4.1 U1.1 | length 92
  Layer 1 - Top Layer w7: U1.1@1889.8,766.88 1919.12,766.88 L3.2@1929.7,756.3 ; L3.2@1929.32,756.3 L3.2@1929.7,756.3 ; L3.2@1931,756.3 L3.2@1929.7,756.3
  Layer 1 - Top Layer w24: C15.1@1972,756.3 L4.1@2018,756.3
NetC16_1: C16.1 C17.2 L4.2 | length 74.4
  Layer 1 - Top Layer w24: L4.2@2059.65,756.3 C16.1@2100,756.3 C17.2@2134,756.3
NetC17_1: C17.1 R4.1 R5.1 | length 34
  Layer 1 - Top Layer w24: C17.1@2184,756.3 R4.1@2218,756.3
NetC19_2: C19.2 R5.2 R6.1 | length 68
  Layer 1 - Top Layer w24: R5.2@2263,756.3 C19.2@2297,756.3 R6.1@2331,756.3
NetC33_1: C33.1 R11.1 | length 116.8
  Layer 1 - Top Layer w10: C33.1@527,742.46 R11.1@527,839.46
  Layer 1 - Top Layer w20: C33.1@513,728.46 C33.1@527,742.46
NetC34_1: C34.1 C36.2 D1.1 D2.2 pad.0@345,880 R13.2 U6.1 | length 433.3
  Layer 1 - Top Layer w10: D1.1@380,993.11 358.65,993.11 346,980.46 346,897.46 356.76,886.7 C36.2@405,886.7 ; D1.1@391.24,1003.23 U6.1@638.86,1003.23
NetC34_2: C34.2 D1.2 D2.1 R11.2 R13.1 U6.2 | length 326.7
  Layer 1 - Top Layer w10: D1.2@382.21,948.04 384,949.83 R13.1@487.21,949.83 550.38,949.83 578.18,977.64 U6.2@638.86,977.64 ; R11.2@532.21,892.09 C34.2@532.21,949.83
NetC36_1: C36.1 R14.1 | length 69
  Layer 1 - Top Layer w10: C36.1@405,839.46 R14.1@474,839.46
NetC38_1: C38.1 pad.0@660,1170 R17.1 U6.5 | length 327
  Layer 1 - Top Layer w10: U6.5@638.86,900.87 677.41,900.87 698,921.46 698,997 660,1035 pad.0@660,1165
NetC41_1: C41.1 R15.2 R16.1 TP5.1 U6.7 | length 600.7
  Layer 1 - Top Layer w10: TP5.1@630,630 630,705 640,715 710,715 R15.2@725,730 ; U6.7@638.86,849.68 712.23,849.68 ; C41.1@712.23,796.31 712.23,849.68 ; R15.2@721.38,733.31 C41.1@721.38,795 ; R16.1@760.76,1061.46 760.76,898.21 712.23,849.68
NetC41_2: C41.2 R14.2 R15.1 U6.6 | length 666.6
  Layer 1 - Top Layer w10: v2(445,890) 470.7,890 R14.2@474,886.7 ; U6.6@638.86,875.27 v2(695.27,875.27) ; R15.1@725,650 765,650 790,675 790,774.5 C41.2@769.5,795 ; C41.2@768.62,795 C41.2@769.5,795 ; v2(769.5,822.71) C41.2@769.5,795
  Layer 4 - Bottom Layer w11: v2@450,890 680.55,890 v2(695.27,875.27) 747.84,822.71 v2(769.5,822.71)
NetC46_1: C46.1 R18.1 R19.2 U6.9 | length 742.8
  Layer 1 - Top Layer w10: v2(700,1255) 735,1255 R18.1@740,1260 740,1174.32 R19.2@739.48,1173.8 ; U6.9@871.14,875.27 929.77,875.27 C46.1@936.65,868.39 v2(964.37,868.39)
  Layer 4 - Bottom Layer w10: v2(700,1255) 830,1125 830,965 926.61,868.39 v2(964.37,868.39)
NetC47_1: C47.1 R20.1 R21.2 U6.12 | length 517.6
  Layer 1 - Top Layer w10: U6.12@871.14,952.05 913.07,952.05 C47.1@936.65,975.63 v2(964.37,975.63) ; R20.1@903,1252.94 v2(948,1252.94) R21.2@993,1252.94
  Layer 4 - Bottom Layer w10: v2(948,1252.94) 920,1224.94 920,990.48 934.84,975.63 v2(964.37,975.63)
NetC48_2: C48.2 E1.1 R6.2 | length 99.3
  Layer 1 - Top Layer w24: R6.2@2381,756.3 C48.2@2415,756.3 E1.1@2480.32,756.3
NetJ2_2: J2.2 U1.23 | length 890.1
  Layer 1 - Top Layer w7: v1(1694.62,770) 1707.25,782.63 U1.23@1740.2,782.63
  Layer 3 - PWR w7: J2.2@1410,62.99 1530,182.99 1530,495 1585,550 1585,685 1670,770 v1(1694.62,770)
NetJ2_3: J2.3 U1.24 | length 810.2
  Layer 1 - Top Layer w7: v1(1694.62,740) 1721.5,766.88 U1.24@1740.2,766.88
  Layer 3 - PWR w7: J2.3@1510,62.99 1550,102.99 1550,486.72 1605,541.72 1605,650.38 v1(1694.62,740)
NetJ2_4: J2.4 U1.25 | length 792.9
  Layer 1 - Top Layer w7: v1(1724.62,735) 1736.82,747.2 U1.25@1759.88,747.2
  Layer 3 - PWR w7: J2.4@1610,62.99 1570,102.99 1570,478.43 1625,533.43 1625,635.38 v1(1724.62,735)
NetJ2_5: J2.5 U1.26 | length 819
  Layer 1 - Top Layer w7: v1(1753,715) 1767,715 1775.63,723.63 U1.26@1775.63,747.2
  Layer 3 - PWR w7: J2.5@1710,62.99 1590,182.99 1590,470.15 1645,525.15 1645,607 v1(1753,715)
NetJ3_1: J3.1 R1.1 | length 89.8
  Layer 1 - Top Layer w7: R1.1@1810,1338.62 1831.38,1338.62 1840,1330 1875,1330 J3.1@1890,1315
NetJ4_1: J4.1 R4.2 | length 184.7
  Layer 1 - Top Layer w15: J4.1@2218,531.63 R4.2@2218,716.3
NetJ5_1: J5.1 Q2.2
NetJ6_1: J6.1 R9.2 | length 189.6
  Layer 4 - Bottom Layer w20: R9.2@1144,255.69 J6.1@1333.62,255.69
NetL3_1: L3.1 U1.2 | length 45.8
  Layer 1 - Top Layer w7: U1.2@1889.8,782.63 1919.63,782.63 1930.7,793.7 L3.1@1931,793.7
NetQ1_2: Q1.2 Q2.3
  other v2: 137,600 163,600 40,835 65,835
NetR10_2: pad.0@620,500 R10.2 R12.2 U6.3 | length 601.4
  Layer 1 - Top Layer w10: R12.2@558.62,530 558.62,915.08 595.59,952.05 U6.3@638.86,952.05 ; R10.2@565,476.65 565,530 590,530 pad.0@620,500